# EAGLE board LED Scematic Version2 (EAGLE 9.2.0)
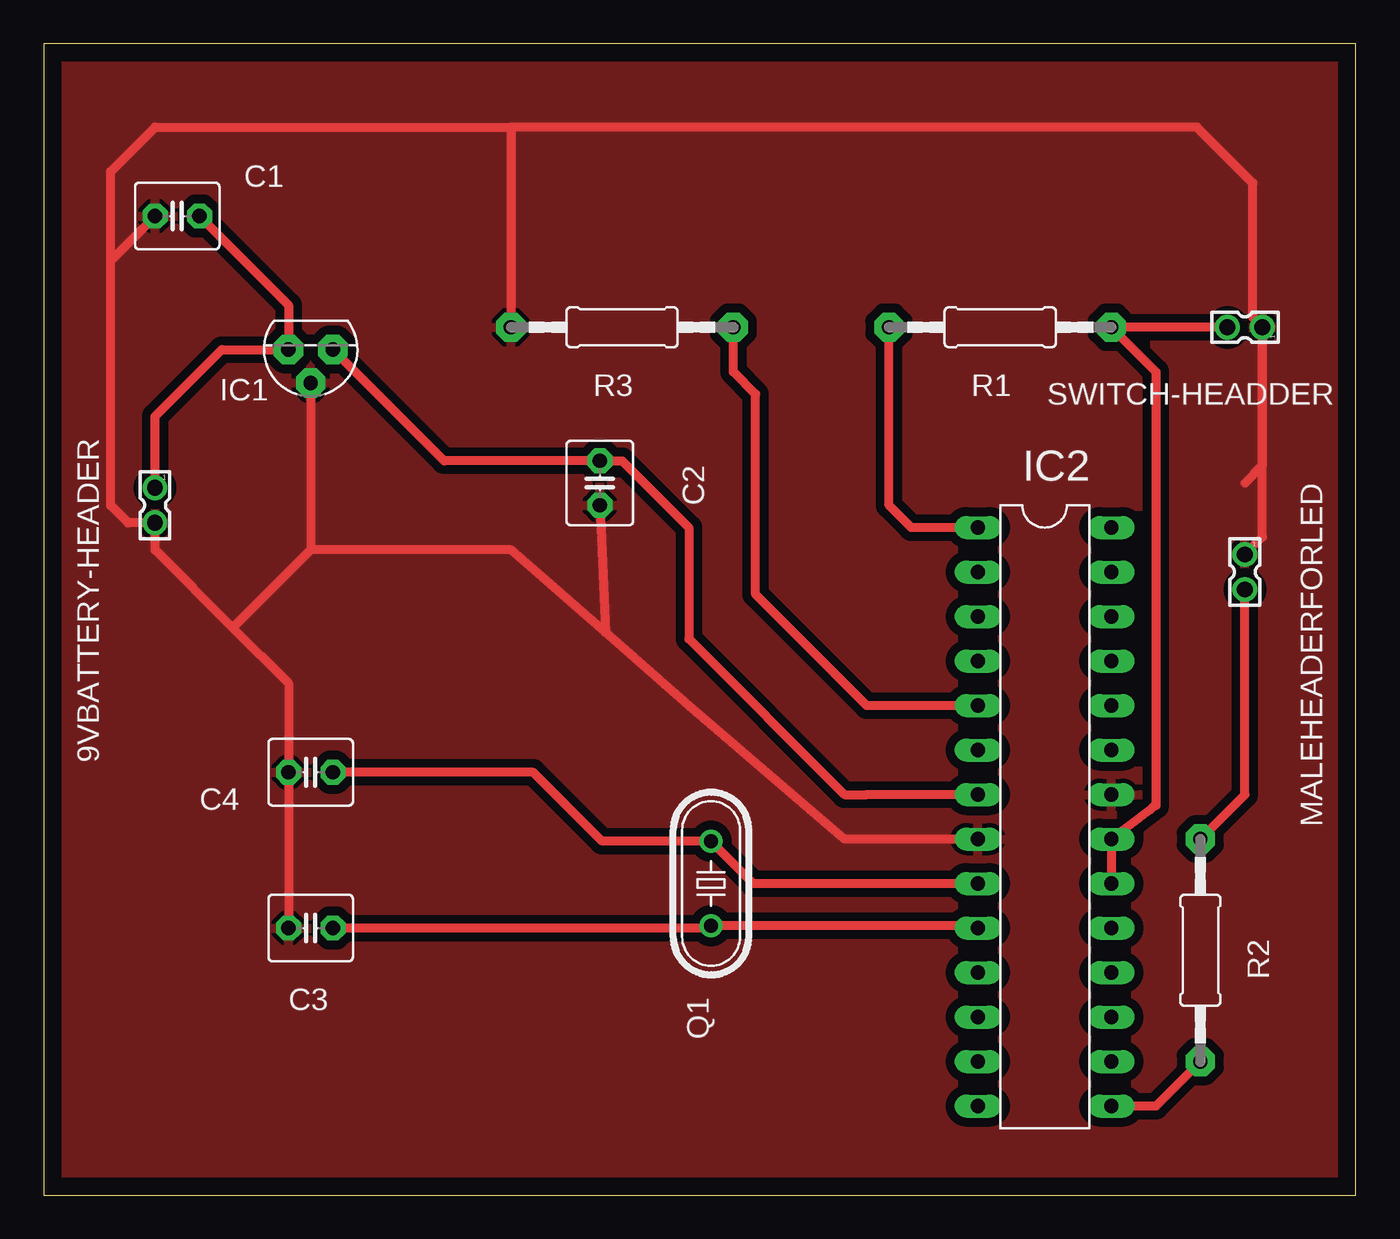
[diagram p0: board, top side]

Size 74.91 x 65.71 mm. Coordinates in mm from the lower left corner, seen from the top.
Outline: 0,0 74.91,0 74.91,65.71 0,65.71 0,0
Copper layers (1*16): Top 0.035mm / dielectric 1.5mm / Bottom 0.035mm
Design rules "default": minimum track width 6mil, minimum drill 0.35mm, track to track 6mil, track to pad 6mil, pad to pad 6mil, via to via 6mil, smd to smd 6mil, copper to edge 40mil, drill to drill 6mil, minimum pad ring 10mil, minimum via ring 8mil, stop-mask expansion 4mil, vias tented up to drill 0mil, thermal gap 10mil
Net classes: 0 default: width 0.508 mm, clearance 0.508 mm

## Footprints (pad centres in the part's own frame; a part is rotated, then mirrored left to right if it is on the bottom)
332-02 = drill 0.9 pad 1.27: 1 0,-1; 2 0,1
C025-040X050 = drill 0.813 pad 1.422 octagon: 1 -1.27,0; 2 1.27,0
TO92 = drill 0.813 pad 1.676 octagon: 1 -1.27,0; 2 0,1.905; 3 1.27,0
DIL28-3 = drill 0.813 long: 1 -16.51,-3.81; 2 -13.97,-3.81; 3 -11.43,-3.81; 4 -8.89,-3.81; 5 -6.35,-3.81; 6 -3.81,-3.81; 7 -1.27,-3.81; 8 1.27,-3.81; 9 3.81,-3.81; 10 6.35,-3.81; 11 8.89,-3.81; 12 11.43,-3.81; 13 13.97,-3.81; 14 16.51,-3.81; 15 16.51,3.81; 16 13.97,3.81; 17 11.43,3.81; 18 8.89,3.81; 19 6.35,3.81; 20 3.81,3.81; 21 1.27,3.81; 22 -1.27,3.81; 23 -3.81,3.81; 24 -6.35,3.81; 25 -8.89,3.81; 26 -11.43,3.81; 27 -13.97,3.81; 28 -16.51,3.81
HC49/S = drill 0.813: 1 -2.413,0; 2 2.413,0
0207/12 = drill 0.813 pad 1.676 octagon: 1 -6.35,0; 2 6.35,0

## Placement (x,y rotation side)
9VBATTERY-HEADER  332-02  [332-02]  6.35,39.37 180 top
C1  10uF  [C025-040X050]  7.62,55.88 180 top
C2  10uF  [C025-040X050]  31.75,40.64 270 top
C3  22pF  [C025-040X050]  15.24,15.24 180 top
C4  22pF  [C025-040X050]  15.24,24.13 180 top
IC1  7805L  [TO92]  15.24,48.26 180 top
IC2  ATMEGA328-20P  [DIL28-3]  57.15,21.59 270 top
MALEHEADERFORLED  332-02  [332-02]  68.58,35.56 180 top
Q1  [HC49/S]  38.1,17.78 90 top
R1  10K  [0207/12]  54.61,49.53 180 top
R2  100ohm  [0207/12]  66.04,13.97 270 top
R3  10k  [0207/12]  33.02,49.53 180 top
SWITCH-HEADDER  332-02  [332-02]  68.58,49.53 90 top

## Library data of the parts
9VBATTERY-HEADER MALEHEADERFORLED SWITCH-HEADDER = con-garry
C1-C4 IC1 R1 R2 = adafruit
IC2 = atmega328
Q1 = adafruit; OC_FARNELL: 1667008; OC_NEWARK: unknown
R3 = adafruit; SPICEPREFIX: R

## Nets
GND: 9VBATTERY-HEADER.2 C1.2 C2.2 C3.2 C4.2 IC1.2 IC2.8 IC2.22 MALEHEADERFORLED.1 R3.2 SWITCH-HEADDER.1
N$1: IC2.1 R1.2
N$2: C4.1 IC2.9 Q1.2
N$3: C3.1 IC2.10 Q1.1
N$4: 9VBATTERY-HEADER.1 C1.1 IC1.3
N$5: C2.1 IC1.1 IC2.7
N$6: IC2.5 R3.1
N$7: IC2.15 R2.2
N$8: MALEHEADERFORLED.2 R2.1
VCC: IC2.20 IC2.21 R1.1 SWITCH-HEADDER.2

## Tracks (layer width: path | path; a pad name or v marks a point on that pad's centre or on a via)
GND
  Top 0.508: C3.2 C4.2 13.97,29.21 10.79,32.38 | 3.81,53.34 3.81,39.37 4.81,38.37 9VBATTERY-HEADER.2 6.35,36.83 10.79,32.38 | 3.81,53.34 C1.2 | 3.81,53.34 3.81,58.42 6.35,60.96 26.67,60.96 | 69.85,49.8 SWITCH-HEADDER.1 | SWITCH-HEADDER.1 69.58,41.64 68.58,40.64 | 26.67,60.96 R3.2 | SWITCH-HEADDER.1 69.05,50.06 69.05,57.76 65.84,60.96 26.67,60.96 | IC1.2 15.24,36.83 | 15.24,36.83 10.79,32.38 | IC2.8 45.72,20.32 36.83,27.94 32.06,32.11 | 32.06,32.11 26.67,36.83 15.24,36.83 | C2.2 32.06,32.11 | MALEHEADERFORLED.1 69.58,37.56 SWITCH-HEADDER.1
  pour Top: -1.27,66.04 -1.27,-1.27 76.2,-1.27 76.2,67.31 -1.27,67.31
N$1
  Top 0.508: IC2.1 49.53,38.1 48.26,39.37 R1.2
N$2
  Top 0.508: C4.1 27.94,24.13 31.88,20.19 Q1.2 40.51,17.78 IC2.9
N$3
  Top 0.508: C3.1 37.97,15.24 Q1.1 53.21,15.37 IC2.10
N$4
  Top 0.508: 9VBATTERY-HEADER.1 6.35,44.45 10.16,48.26 IC1.3 13.97,50.8 C1.1
N$5
  Top 0.508: IC1.1 22.86,41.91 C2.1 33.02,41.91 36.83,38.1 36.83,31.75 45.72,22.86 46.99,22.86 48.26,22.86 IC2.7
N$6
  Top 0.508: IC2.5 46.99,27.94 40.64,34.29 40.64,45.72 39.37,46.99 R3.1
N$7
  Top 0.508: R2.2 63.5,5.08 IC2.15
N$8
  Top 0.508: R2.1 68.58,22.86 MALEHEADERFORLED.2
VCC
  Top 0.508: IC2.20 IC2.21 63.2,22 | 63.5,22.23 63.2,22 | 63.2,22 63.5,22.3 63.5,46.99 R1.1 SWITCH-HEADDER.2